# Altium PCB EPS 2023-24.PcbDoc (part 1 of 2)
Units mm, origin at the board's own origin, x right, y up, seen from the top; angles counter-clockwise.
Board outline 95.88 x 90.17 mm, 2 copper layers (Top, Bottom); 258 components, 125 nets, 766 pads, 194 vias.
Unrouted connection lines stored in the file: 96.
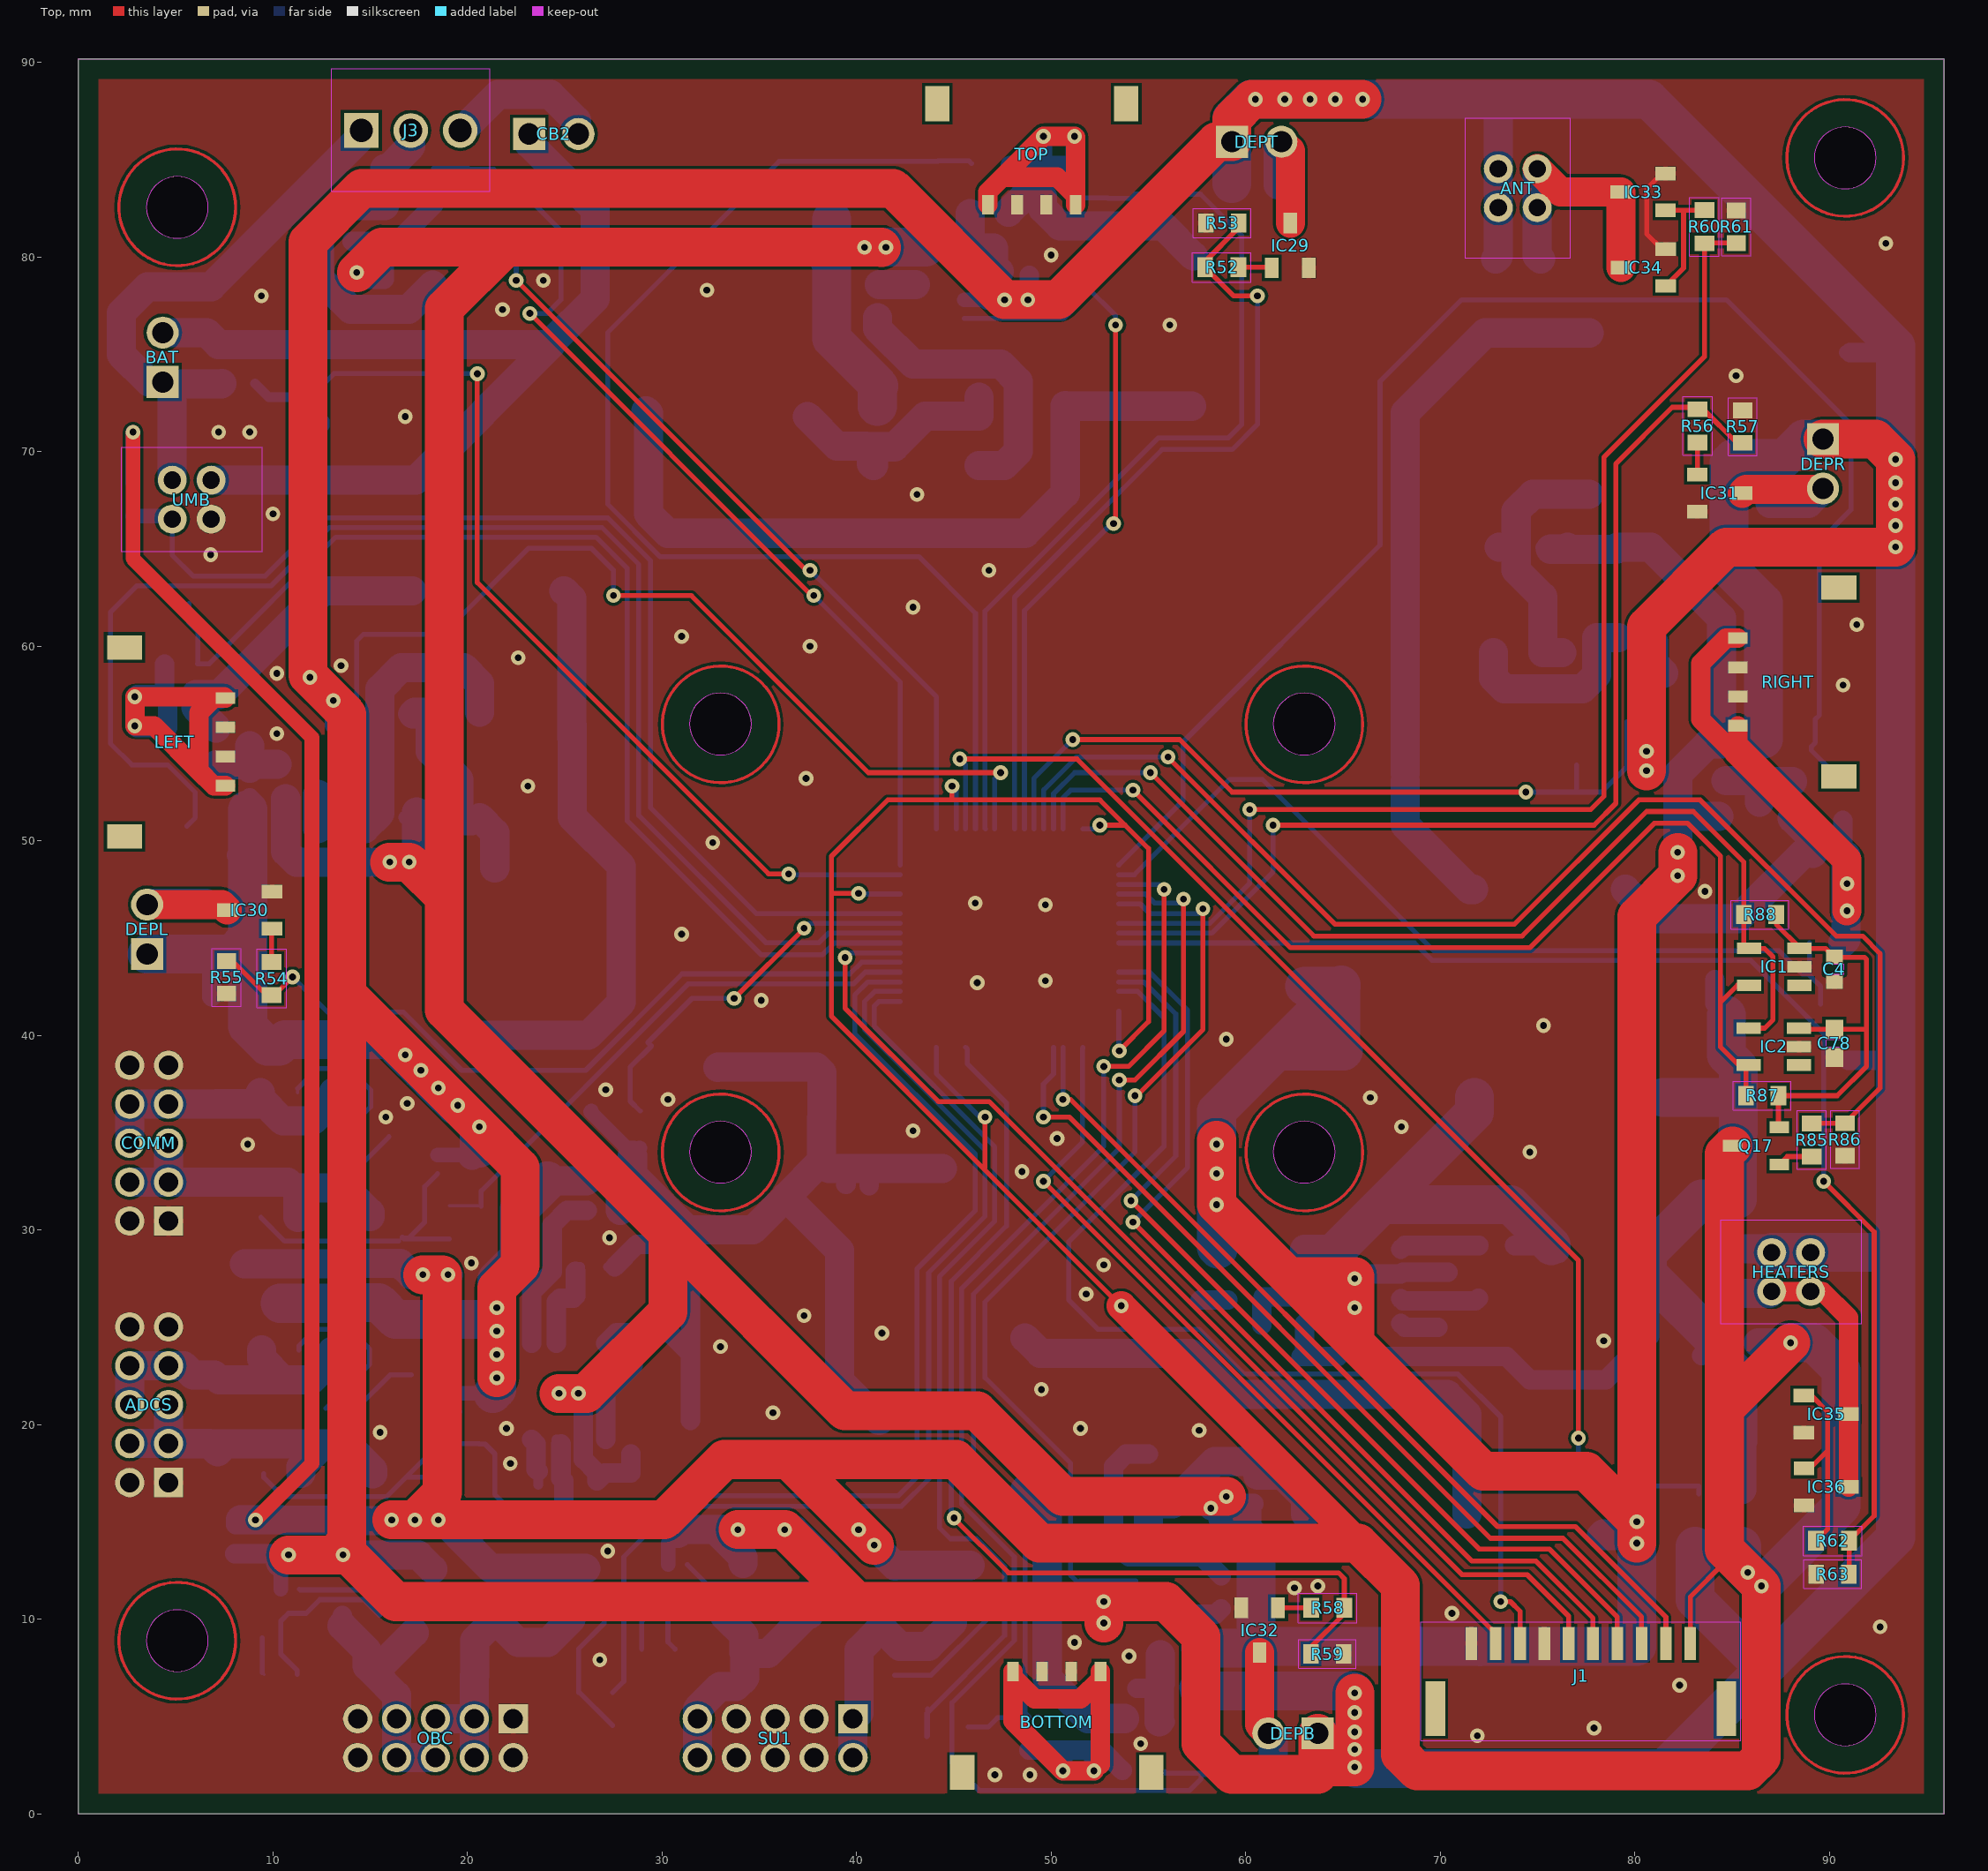
[diagram p0: Top view]
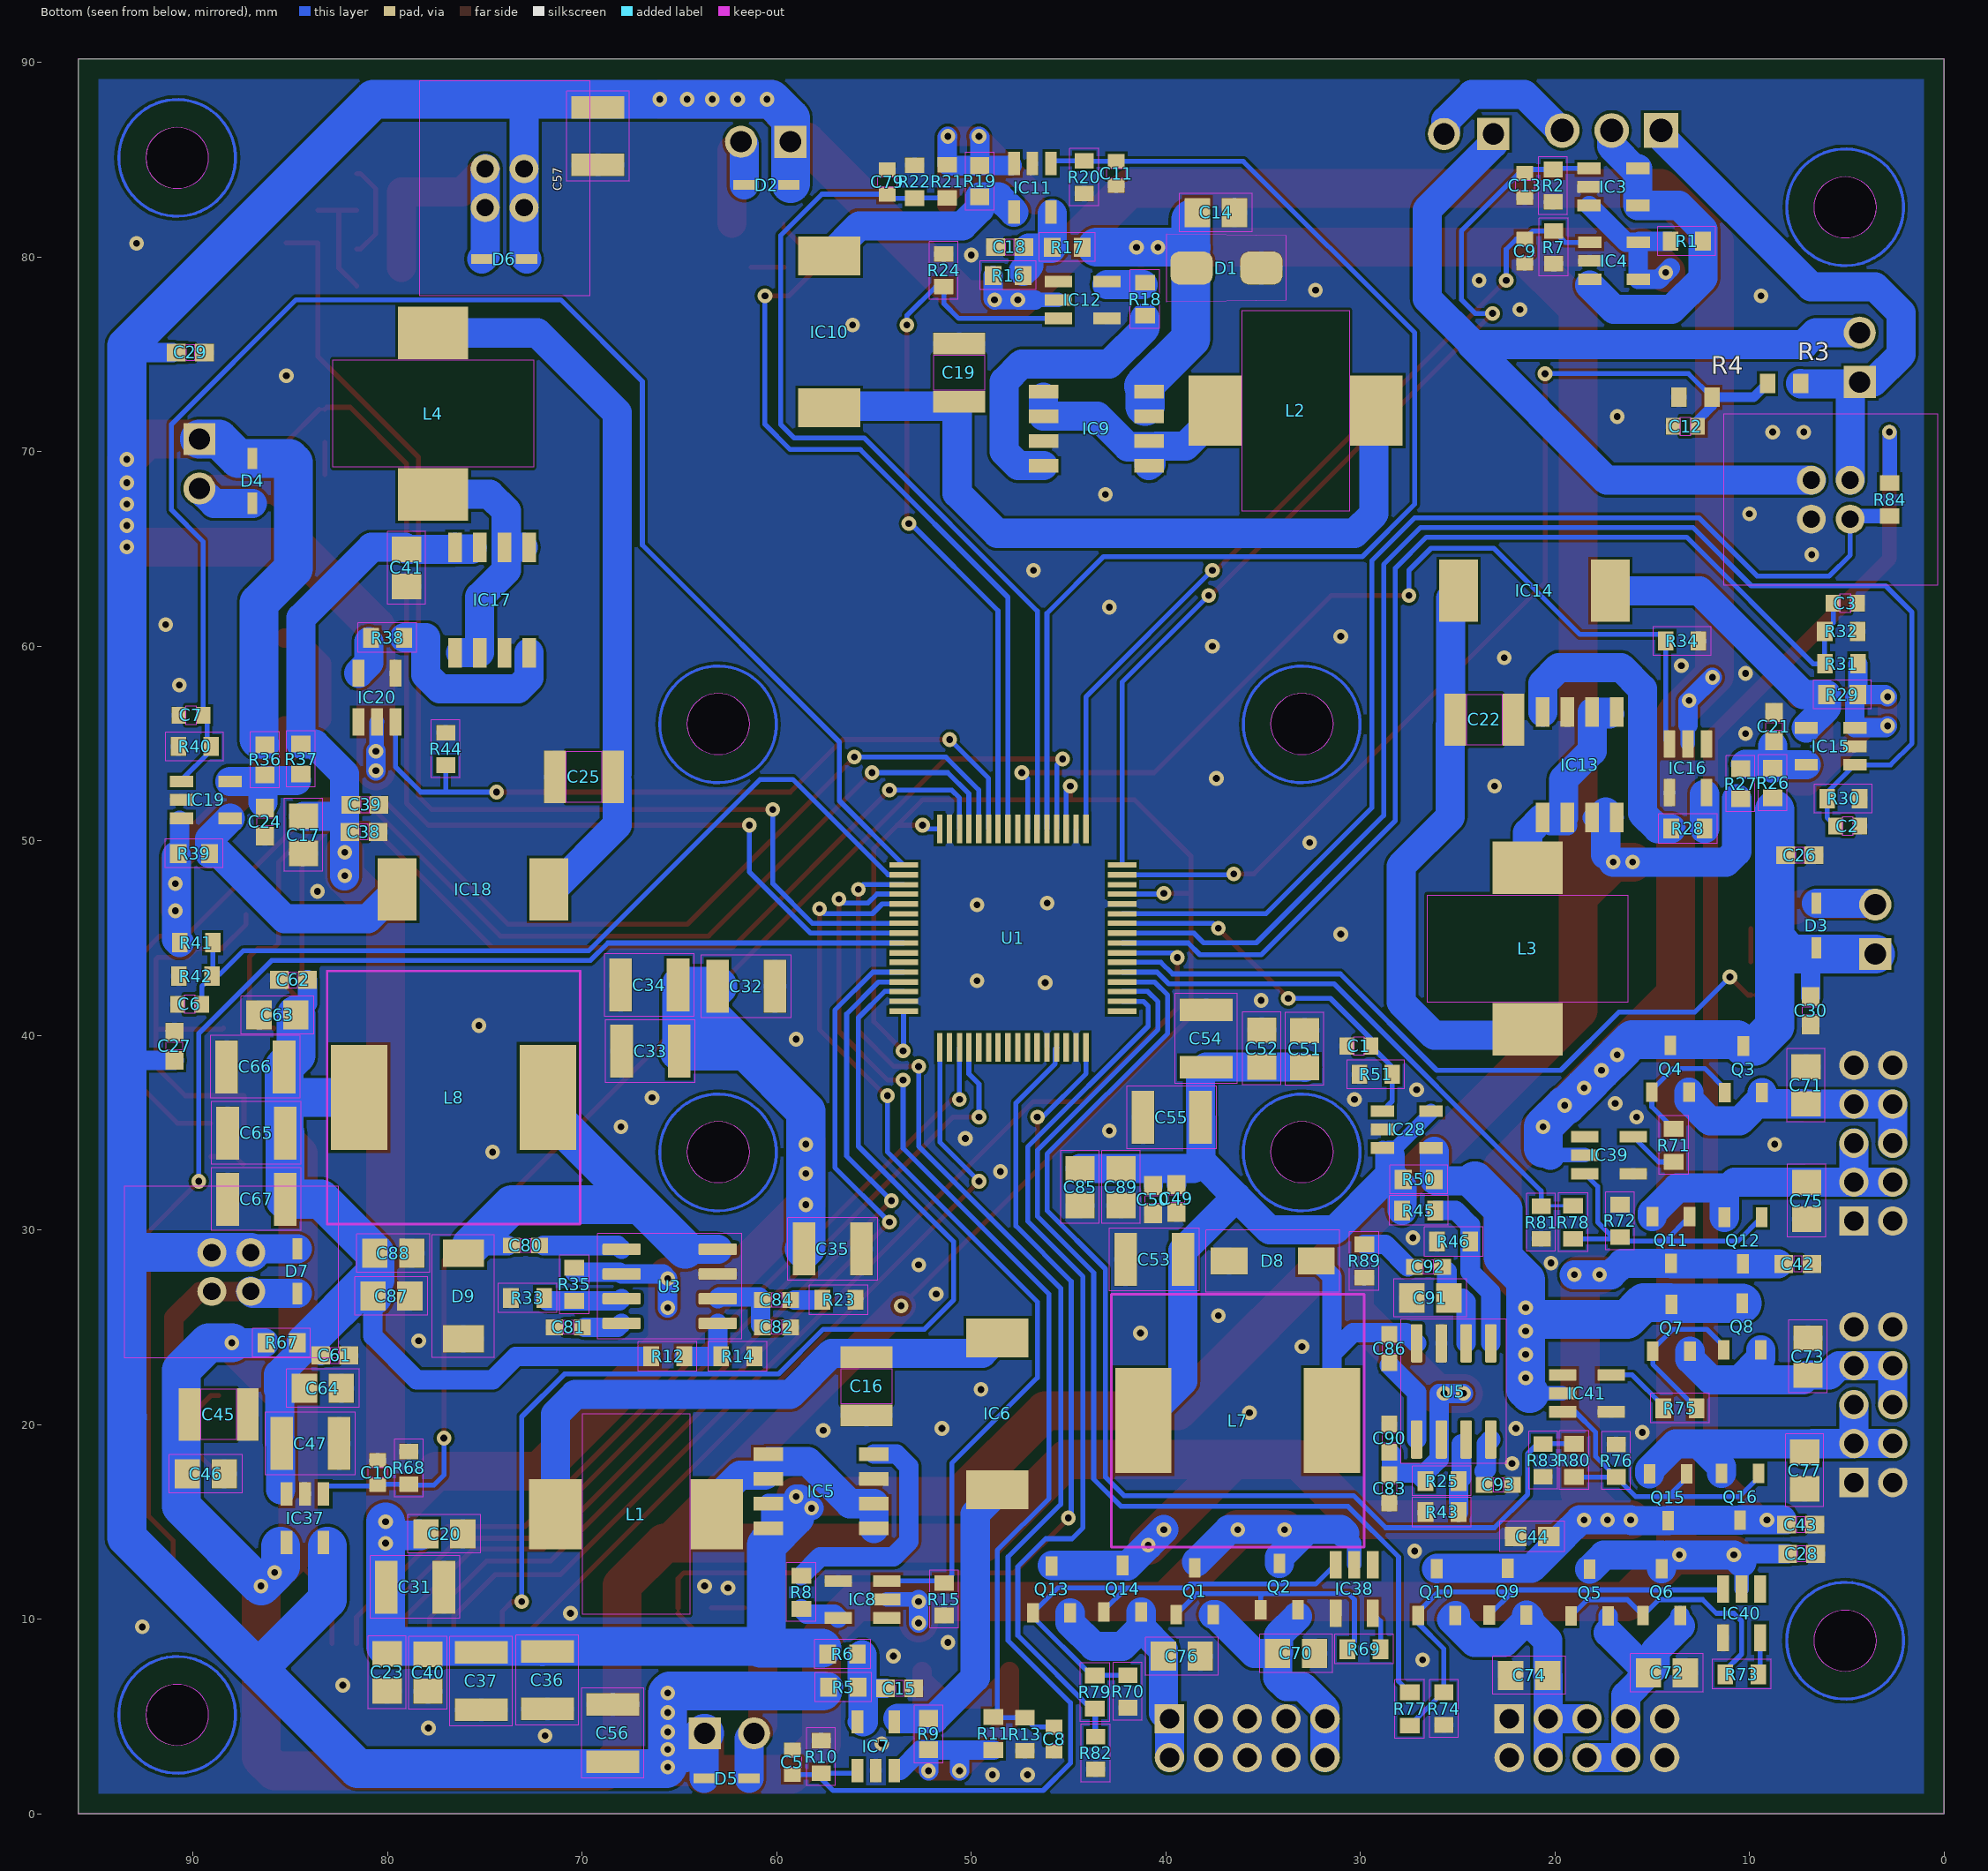
[diagram p1: Bottom view, seen from below]

## Layer stack, top to bottom
Top Solder: solder mask 0.0102, Solder Resist, Dk 3.5
Top: signal copper 0.035
Dielectric 1: dielectric 0.32, FR-4, Dk 4.8
Bottom: signal copper 0.035
Bottom Solder: solder mask 0.0102, Solder Resist, Dk 3.5

## Board outline
0,90.17 0,0 95.885,0 95.885,90.17
cut-out: 63,54.41 ccw(c63,56) 64.59,56 ccw(c63,56) 63,57.59 ccw(c63,56) 61.41,56 ccw(c63,56)
cut-out: 33,54.41 ccw(c33,56) 34.59,56 ccw(c33,56) 33,57.59 ccw(c33,56) 31.41,56 ccw(c33,56)
cut-out: 63,32.41 ccw(c63,34) 64.59,34 ccw(c63,34) 63,35.59 ccw(c63,34) 61.41,34 ccw(c63,34)
cut-out: 33,32.41 ccw(c33,34) 34.59,34 ccw(c33,34) 33,35.59 ccw(c33,34) 31.41,34 ccw(c33,34)
cut-out: 5.08,80.96 ccw(c5.08,82.55) 6.67,82.55 ccw(c5.08,82.55) 5.08,84.14 ccw(c5.08,82.55) 3.49,82.55 ccw(c5.08,82.55)
cut-out: 5.08,7.3 ccw(c5.08,8.89) 6.67,8.89 ccw(c5.08,8.89) 5.08,10.48 ccw(c5.08,8.89) 3.49,8.89 ccw(c5.08,8.89)
cut-out: 90.81,3.49 ccw(c90.81,5.08) 92.4,5.08 ccw(c90.81,5.08) 90.81,6.67 ccw(c90.81,5.08) 89.22,5.08 ccw(c90.81,5.08)
cut-out: 90.81,83.5 ccw(c90.81,85.09) 92.4,85.09 ccw(c90.81,85.09) 90.81,86.68 ccw(c90.81,85.09) 89.22,85.09 ccw(c90.81,85.09)

## Design rules (kind name [scope] priority, off if disabled: settings)
BoardOutlineClearance mdCopperDimension [All] p1: gap=0.254 ignorepadtopadclearanceinfootprint=FALSE except(0: Arc-SplitContinuation Track-SplitContinuation SMDPad-SplitContinuation THPad-SplitContinuation Via-SplitContinuation Fill-SplitContinuation Poly-SplitContinuation Region-SplitContinuation Text-SplitContinuation; 1.016: Poly-OutlineEdge Poly-CavityEdge Poly-CutoutEdge Poly-SplitBarrior)
Clearance "Clearance (Same Net)" [All] p1: gap=0.152 ignorepadtopadclearanceinfootprint=FALSE
Clearance [All] p2: gap=0.152 ignorepadtopadclearanceinfootprint=FALSE
HoleSize [All] p1: absolutevalues=TRUE maxlimit=2540 minlimit=0.35 maxpercent=80.000 minpercent=20.000
HoleToHoleClearance mdDrill [All] p1: gap=0.152 allowstackedmicrovias=TRUE
MinimumSolderMaskSliver [All] p1 off: minsoldermaskwidth=0.254
PasteMaskExpansion Expansion_SMDPaste_OFF [InPadClass('SMDPaste_OFF')] p1: expansion=0
PasteMaskExpansion mlMinCreamFrame [All] p2: expansion=0
PolygonConnect PolygonConnect_For_PolygonThermal_ON_Width100000_Gap0 [InPolygonClass('PolygonThermal_ON_Width100000_Gap0') vs Not IsVia] p1: connectstyle=Relief reliefconductorwidth=0.254 reliefentries=4 polygonreliefangle="90 Angle" airgapwidth=0
PolygonConnect ThermalVias [IsVia] p2: connectstyle=Direct reliefconductorwidth=0.254 reliefentries=4 polygonreliefangle="90 Angle" airgapwidth=0.254
PolygonConnect [All] p3: connectstyle=Relief reliefconductorwidth=0.254 reliefentries=4 polygonreliefangle="90 Angle" airgapwidth=0.254
RoutingVias [All] p1: holewidth=0.35 width=0.756 viastyle="Through Hole" minholewidth=0.35 minwidth=0.756 maxholewidth=2.54 maxwidth=2.54
SolderMaskExpansion mlMinStopFrame [All] p1: expansion=0.102 istentingtop=FALSE
Width [All] p1: maxlimit=0.254 minlimit=0.152 preferedwidth=0.152
26 further rules are at their usual default settings.

## Classes and differential pairs
polygon class PolygonThermal_ON_Width100000_Gap0: Polygon_1_Net_GND Polygon_2_Net_GND
pad class SMDPaste_OFF: D9-1 D9-2

## Components (designator, comment, footprint, x,y, rotation, side; value= is the part's Value field where it differs from the comment)
ADCS "" SHDR10W55P200_2X5_1265X630X640 4.63,17.02 r90 top
ANT "" SAMTEC-TMM-102-01-X-D 73.98,83.53 r180 top
BAT "" SHDR2W64P0X254_1X2_508X580X117 4.33,73.57 r270 top
BOTTOM "" 5040500491 50.28,7.31 r180 top
C1 "" YAG_CC0603_YAG-L 30.07,39.45 r180 bottom
C2 "" YAG_CC0603_YAG-L 4.95,50.75 r0 bottom
C3 "" YAG_CC0603_YAG-L 5.07,62.2 r0 bottom
C4 "1uf" YAG_CC0603_YAG-L 90.25,43.39 r90 top
C5 "" YAG_CC0603_YAG-L 59.2,2.64 r270 bottom
C6 "" YAG_CC0603_YAG-L 90.17,41.6 r180 bottom
C7 "" YAG_CC0603_YAG-L 90.1,56.45 r180 bottom
C8 "" YAG_CC0603_YAG-L 45.74,3.83 r90 bottom
C9 "" YAG_CC0603_YAG-L 21.54,80.3 r90 bottom
C10 "" YAG_CC0603_YAG-L 80.51,17.53 r270 bottom
C11 "" YAG_CC0603_YAG-L 42.54,84.29 r90 bottom
C12 "" YAG_CC0603_YAG-L 13.29,71.29 r180 bottom
C13 "" YAG_CC0603_YAG-L 21.54,83.68 r90 bottom
C14 "" CAPC2012X70 37.42,82.28 r180 bottom
C15 "" YAG_CC0603_YAG 53.68,6.44 r0 bottom
C16 "" CAP_CC1210_YAG 55.38,21.96 r90 bottom
C17 "" CAPC2012X70 84.32,50.3 r270 bottom
C18 "" YAG_CC0603_YAG 48.02,80.51 r180 bottom
C19 "" CAP_CC1210_YAG 50.62,74.06 r270 bottom
C20 "" CAPC2012X70 77.08,14.38 r180 bottom
C21 "" YAG_CC0603_YAG 8.74,55.87 r270 bottom
C22 "" CAP_CC1210_YAG 23.62,56.22 r0 bottom
C23 "" CAPC2012X70 80.02,7.26 r270 bottom
C24 "" YAG_CC0603_YAG 86.3,50.96 r90 bottom
C25 "" CAP_CC1210_YAG 69.9,53.28 r180 bottom
C26 "" YAG_CC0603_YAG 7.41,49.25 r0 bottom
C27 "" YAG_CC0603_YAG 90.95,39.44 r270 bottom
C28 "" YAG_CC0603_YAG 7.31,13.35 r0 bottom
C29 "" YAG_CC0603_YAG 90.13,75.09 r0 bottom
C30 "" YAG_CC0603_YAG 6.85,41.26 r90 bottom
C31 "" CAPC3225X280N 78.58,11.64 r0 bottom
C32 "" CAPC3225X280N 61.56,42.52 r0 bottom
C33 "" CAPC3225X280N 66.49,39.18 r180 bottom
C34 "" CAPC3225X280N 66.54,42.58 r180 bottom
C35 "" CAPC3225X280N 57.11,29.02 r0 bottom
C36 "" CAPC3225X280N 71.78,6.86 r90 bottom
C37 "" CAPC3225X280N 75.18,6.81 r90 bottom
C38 "" YAG_CC0603_YAG 81.21,50.45 r0 bottom
C39 "" YAG_CC0603_YAG 81.16,51.85 r0 bottom
C40 "" CAPC2012X70 77.92,7.24 r270 bottom
C41 "" CAPC2012X70 79.02,64.02 r270 bottom
C42 "" YAG_CC0603_YAG 7.51,28.25 r0 bottom
C43 "" YAG_CC0603_YAG 7.36,14.85 r0 bottom
C44 "" CAPC1608X90 21.16,14.24 r0 bottom
C45 "" CAP_CC1210_YAG 88.68,20.52 r0 bottom
C46 "" CAPC2012X70 89.34,17.46 r180 bottom
C47 "" CAPC3225X280N 83.96,19.02 r0 bottom
C49 "" YAG_CC0603_YAG 39.45,31.61 r90 bottom
C50 "" YAG_CC0603_YAG 40.65,31.56 r90 bottom
C51 "" CAPC2012X70 32.86,39.3 r90 bottom
C52 "" CAPC2012X70 35.06,39.32 r90 bottom
C53 "" CAPC3225X280N 40.59,28.48 r180 bottom
C54 "" CAPC3225X280N 37.92,39.84 r270 bottom
C55 "" CAPC3225X280N 39.69,35.78 r180 bottom
C56 "" CAPC3225X280N 68.42,4.14 r270 bottom
C57 "" CAPC3225X280N 69.18,86.21 r90 bottom
C61 "" YAG_CC0603_YAG 82.71,23.55 r0 bottom
C62 "" YAG_CC0603_YAG 84.84,42.85 r180 bottom
C63 "" CAPC2012X70 85.66,41.04 r0 bottom
C64 "" CAPC2012X70 83.32,21.86 r180 bottom
C65 "" CAPC3225X280N 86.74,34.98 r180 bottom
C66 "" CAPC3225X280N 86.79,38.38 r180 bottom
C67 "" CAPC3225X280N 86.74,31.58 r180 bottom
C70 "" CAPC2012X70 33.3,8.24 r0 bottom
C71 "" CAPC2012X70 7.09,37.43 r270 bottom
C72 "" CAPC2012X70 14.24,7.24 r0 bottom
C73 "" CAPC2012X70 6.99,23.49 r270 bottom
C74 "" CAPC2012X70 21.32,7.11 r180 bottom
C75 "" CAPC2012X70 7.06,31.5 r90 bottom
C76 "" CAPC2012X70 39.17,8.09 r0 bottom
C77 "" CAPC2012X70 7.16,17.64 r90 bottom
C78 "1uf" YAG_CC0603_YAG 90.25,39.59 r270 top
C79 "" YAG_CC0603_YAG-L 54.31,83.85 r270 bottom
C80 "" CC0603N_YAG 72.9,29.2 r180 bottom
C81 "" CC0603N_YAG 70.7,25 r180 bottom
C82 "" CC0603N_YAG 60,25 r0 bottom
C83 "" CC0603N_YAG 28.5,16.7 r270 bottom
C84 "" CC0603N_YAG 60,26.4 r0 bottom
C85 "" CAPC2012X70 44.4,32.2 r270 bottom
C86 "" CC0603N_YAG 28.5,23.9 r270 bottom
C87 "" CAPC2012X70 79.8,26.6 r180 bottom
C88 "" CAPC2012X70 79.7,28.8 r180 bottom
C89 "" CAPC2012X70 42.3,32.2 r270 bottom
C90 "" CC0603N_YAG 28.5,19.3 r270 bottom
C91 "" CAPC2012X70 26.4,26.5 r0 bottom
C92 "" CC0603N_YAG 26.5,28.1 r180 bottom
C93 "" CC0603N_YAG 22.9,16.9 r0 bottom
CB2 "" SHDR2W64P0X254_1X2_508X580X117 23.16,86.32 r180 top
COMM "" SHDR10W55P200_2X5_1265X630X640 4.63,30.46 r90 top
D1 "" DIOM449X264X300L114X135N 36.88,79.43 r180 bottom
D2 "" SOD2512X110N 60.52,83.7 r0 bottom
D3 "" SOD2512X110N 6.55,45.64 r90 bottom
D4 "" SOD2512X110N 86.94,68.49 r270 bottom
D5 "" SOD2512X110N 62.57,1.81 r180 bottom
D6 "" SOD2512X110N 74,79.89 r0 bottom
D7 "" SOD2512X110N 84.64,27.88 r270 bottom
D8 "" DIOM5226X100N 34.5,28.4 r0 bottom
D9 "" DIO_PMEG6030EVPX 76.1,26.6 r270 bottom
DEPB "" SHDR2W64P0X254_1X2_508X580X117 63.7,4.13 r0 top
DEPL "" SHDR2W64P0X254_1X2_508X580X117 3.53,44.18 r270 top
DEPR "" SHDR2W64P0X254_1X2_508X580X117 89.67,70.64 r90 top
DEPT "" SHDR2W64P0X254_1X2_508X580X117 59.29,85.92 r180 top
HEATERS "" SAMTEC-TMM-102-01-X-D 88.03,27.84 r90 top
IC1 "" SOT95P280X145-5N#1 87.16,43.52 r180 top
IC2 "" SOT95P280X145-5N#1 87.14,39.42 r180 top
IC3 "" SOT95P280X145-5N#2 16.99,83.6 r180 bottom
IC4 "" SOT95P280X145-5N#2 16.96,79.8 r180 bottom
IC5 "" SOIC127P600X175-8N 57.71,16.57 r0 bottom
IC6 "" SRU8043220Y 48.65,20.55 r90 bottom
IC7 "" SOT95P280X145-5N#2 54.9,3.47 r90 bottom
IC8 "" SOT95P270X145-5N 55.59,11.01 r0 bottom
IC9 "" SOIC127P600X175-8N 43.57,71.18 r180 bottom
IC10 "" SRU8043220Y 57.3,76.15 r270 bottom
IC11 "" SOT95P280X145-5N#2 46.85,83.55 r270 bottom
IC12 "" SOT95P270X145-5N 44.27,77.79 r180 bottom
IC13 "" SOIC127P600X175-8N 18.72,53.9 r270 bottom
IC14 "" SRU8043220Y 21.05,62.85 r0 bottom
IC15 "" SOT95P280X145-5N#2 5.83,54.85 r0 bottom
IC16 "" SOT95P270X145-5N 13.16,53.73 r270 bottom
IC17 "" SOIC127P600X175-8N 74.63,62.37 r90 bottom
IC18 "" SRU8043220Y 75.6,47.5 r180 bottom
IC19 "" SOT95P280X145-5N#2 89.34,52.1 r180 bottom
IC20 "" SOT95P270X145-5N 80.54,57.36 r90 bottom
IC28 "" SOT95P280X145-5N#2 27.62,35.16 r180 bottom
IC29 "" SOT95P240X120-3N 62.29,80.59 r90 top
IC30 "" SOT95P240X120-3N 8.8,46.44 r180 top
IC31 "" SOT95P240X120-3N 84.36,67.86 r0 top
IC32 "" SOT95P240X120-3N 60.71,9.43 r270 top
IC33 "" SOT95P240X120-3N 80.42,83.34 r180 top
IC34 "" SOT95P240X120-3N 80.43,79.46 r180 top
IC35 "" SOT95P240X120-3N 89.83,20.54 r0 top
IC36 "" SOT95P240X120-3N 89.84,16.79 r0 top
IC37 "" SOT95P280X145-5N#2 84.24,15.19 r270 bottom
IC38 "" SOT95P270X145-5N 30.31,11.55 r270 bottom
IC39 "" SOT95P270X145-5N 17.21,33.84 r180 bottom
IC40 "" SOT95P270X145-5N 10.4,10.29 r270 bottom
IC41 "" SOT95P270X145-5N 18.35,21.6 r180 bottom
J1 "" JST_BM10B-GHS-TBT(LF)(SN)(N) 77.22,6.43 r0 top
J3 "" MOLEX_0022272031 17.08,86.5 r180 top
L1 "" IND_B82464G4_EPC 67.22,15.4 r0 bottom
L2 "" IND_B82464G4_EPC 33.32,72.1 r180 bottom
L3 "" IND_B82464G4_EPC 21.4,44.46 r270 bottom
L4 "" IND_B82464G4_EPC 77.65,71.95 r90 bottom
L7 "" INDP125125X600N 36.3,20.2 r180 bottom
L8 "" INDP125125X600N 76.6,36.8 r180 bottom
LEFT "" 5040500491 7.56,55.08 r90 top
OBC "" SHDR10W55P200_2X5_1265X630X640 22.35,4.88 r180 top
Q1 "" SOT96P237X111-3N 38.51,11.44 r90 bottom
Q2 "" SOT96P237X111-3N 34.16,11.67 r90 bottom
Q3 "" SOT96P237X111-3N 10.31,38.25 r90 bottom
Q4 "" SOT96P237X111-3N 14.06,38.28 r90 bottom
Q5 "" SOT96P237X111-3N 18.21,11.36 r90 bottom
Q6 "" SOT96P237X111-3N 14.51,11.39 r90 bottom
Q7 "" SOT96P237X111-3N 14.01,24.97 r90 bottom
Q8 "" SOT96P237X111-3N 10.37,25.03 r90 bottom
Q9 "" SOT96P237X111-3N 22.42,11.41 r90 bottom
Q10 "" SOT96P237X111-3N 26.07,11.39 r90 bottom
Q11 "" SOT96P237X111-3N 14.03,29.48 r270 bottom
Q12 "" SOT96P237X111-3N 10.33,29.45 r270 bottom
Q13 "" SOT96P237X111-3N 45.87,11.53 r90 bottom
Q14 "" SOT96P237X111-3N 42.22,11.56 r90 bottom
Q15 "" SOT96P237X111-3N 14.18,16.26 r270 bottom
Q16 "" SOT96P237X111-3N 10.48,16.28 r270 bottom
Q17 "" SOT96P237X111-3N 86.22,34.32 r180 top
R1 "" RESC1608X55N#1 13.22,80.81 r0 bottom
R2 "" RESC1608X55N#1 20.09,83.66 r90 bottom
R3 "" RESC1608X55N#2 8.22,73.49 r180 bottom
R4 "" RESC1608X55N#2 12.77,72.79 r180 bottom
R5 "" RESC1508X50N 56.57,6.5 r0 bottom
R6 "" RESC1508X50N 56.61,8.2 r0 bottom
R7 "" RESC1608X55N#1 20.06,80.5 r270 bottom
R8 "" RESC1608X55N#3 58.73,11.38 r90 bottom
R9 "" RESC1608X55N#4 52.19,4.09 r90 bottom
R10 "" RESC1608X55N#1 57.71,2.92 r270 bottom
R11 "" RESC1608X55N#2 48.86,4.12 r270 bottom
R12 "" RESC1608X55N#3 65.6,23.5 r180 bottom
R13 "" RESC1608X55N#2 47.24,4.08 r90 bottom
R14 "" RESC1608X55N#3 62,23.5 r180 bottom
R15 "" RESC1608X55N#1 51.39,11.02 r90 bottom
R16 "" RESC1508X50N 48.1,79.05 r0 bottom
R17 "" RESC1508X50N 45.06,80.5 r180 bottom
R18 "" RESC1608X55N#3 41.07,77.83 r270 bottom
R19 "" RESC1608X55N#4 49.56,83.89 r270 bottom
R20 "" RESC1608X55N#1 44.19,84.1 r90 bottom
R21 "" RESC1608X55N#2 51.24,83.88 r90 bottom
R22 "" RESC1608X55N#2 52.91,83.87 r270 bottom
R23 "" RESC1608X55N#3 56.8,26.4 r0 bottom
R24 "" RESC1608X55N#1 51.41,79.31 r270 bottom
R25 "" RESC1608X55N#3 25.8,17.1 r0 bottom
R26 "" RESC1508X50N 8.8,52.97 r270 bottom
R27 "" RESC1508X50N 10.45,52.93 r270 bottom
R28 "" RESC1608X55N#3 13.16,50.62 r0 bottom
R29 "" RESC1608X55N#4 5.23,57.51 r0 bottom
R30 "" RESC1608X55N#1 5.17,52.16 r0 bottom
R31 "" RESC1608X55N#2 5.27,59.09 r180 bottom
R32 "" RESC1608X55N#2 5.28,60.76 r0 bottom
R33 "" RESC1608X55N#3 72.8,26.5 r180 bottom
R34 "" RESC1608X55N#1 13.46,60.26 r0 bottom
R35 "" RESC1608X55N#3 70.4,27.2 r90 bottom
R36 "" RESC1508X50N 86.3,54.16 r90 bottom
R37 "" RESC1508X50N 84.45,54.2 r90 bottom
R38 "" RESC1608X55N#3 80,60.43 r180 bottom
R39 "" RESC1608X55N#4 89.95,49.34 r180 bottom
R40 "" RESC1608X55N#1 89.91,54.84 r180 bottom
R41 "" RESC1608X55N#2 89.83,44.76 r0 bottom
R42 "" RESC1608X55N#2 89.87,43.04 r180 bottom
R43 "" RESC1608X55N#3 25.8,15.5 r180 bottom
R44 "" RESC1608X55N#1 77.01,54.72 r270 bottom
R45 "" RESC1608X55N#3 27,31 r180 bottom
R46 "" RESC1608X55N#3 25.2,29.4 r0 bottom
R50 "" RESC1608X55N#4 26.99,32.59 r180 bottom
R51 "" RESC1608X55N#1 29.2,37.99 r180 bottom
R52 "" RESC1608X55N#3 58.76,79.47 r180 top
R53 "" RESC1608X55N#1 58.79,81.74 r0 top
R54 "" RESC1608X55N#3 9.93,42.92 r270 top
R55 "" RESC1608X55N#1 7.61,42.98 r90 top
R56 "" RESC1608X55N#3 83.22,71.32 r90 top
R57 "" RESC1608X55N#1 85.54,71.28 r270 top
R58 "2.7" RESC1608X55N#3 64.21,10.58 r0 top
R59 "56k" RESC1608X55N#1 64.19,8.21 r180 top
R60 "" RESC1608X55N#3 83.57,81.55 r90 top
R61 "" RESC1608X55N#1 85.21,81.55 r90 top
R62 "2.7" RESC1608X55N#3 90.16,14.02 r180 top
R63 "56k" RESC1608X55N#1 90.16,12.31 r180 top
R67 "" RESC1608X55N#4 85.44,24.2 r0 bottom
R68 "" RESC1608X55N#1 78.9,17.77 r270 bottom
R69 "" RESC1608X55N#3 29.81,8.46 r0 bottom
R70 "" RESC1608X55N#1 41.95,6.28 r270 bottom
R71 "" RESC1608X55N#3 13.89,34.35 r90 bottom
R72 "" RESC1608X55N#1 16.65,30.46 r90 bottom
R73 "" RESC1608X55N#3 10.39,7.16 r0 bottom
R74 "" RESC1608X55N#1 25.7,5.4 r270 bottom
R75 "" RESC1608X55N#3 13.57,20.84 r180 bottom
R76 "" RESC1608X55N#1 16.85,18.14 r90 bottom
R77 "" RESC1608X55N#3 27.46,5.38 r270 bottom
R78 "" RESC1608X55N#3 19.06,30.39 r270 bottom
R79 "" RESC1608X55N#3 43.64,6.25 r90 bottom
R80 "" RESC1608X55N#3 19.01,18.16 r270 bottom
R81 "" RESC1608X55N#1 20.7,30.38 r90 bottom
R82 "" RESC1608X55N#1 43.6,3.12 r90 bottom
R83 "" RESC1608X55N#1 20.6,18.16 r90 bottom
R84 "" RESC1608X55N#2 2.79,67.53 r90 bottom
R85 "" RESC1608X55N#3 89.09,34.62 r270 top
R86 "" RESC1608X55N#1 90.8,34.65 r270 top
R87 "" RESC1608X55N#1 86.54,36.9 r0 top
R88 "" RESC1608X55N#1 86.43,46.2 r0 top
R89 "" RESC1608X55N#3 29.8,28.4 r90 bottom
RIGHT "" 5040500491 85.29,58.16 r270 top
SU1 "" SHDR10W55P200_2X5_1265X630X640 39.81,4.88 r180 top
TOP "" 5040500491 49,82.69 r0 top
U1 "" QFP50P1200X1200X160-64N 47.86,45 r0 bottom
U3 "" SOIC127P599X175-8N 65.5,27.1 r180 bottom
U5 "" SOIC127P599X175-8N 25.2,21.7 r90 bottom
UMB "" SAMTEC-TMM-102-01-X-D 5.82,67.53 r270 top

## Footprints (in the part's own frame and the unit in brackets; to place one, negate y for a bottom-side part, rotate by r counter-clockwise, add the part's x,y. Pads: shape width x height; smd on the part's side, far side on the other; paste and mask are expansions set on the pad)
5040500491 [mm] "5040500491"
  rect 0.6x1 smd: 1(2.25,0) 2(0.75,0) 3(-0.75,0) 4(-2.25,0)
  rect 1.25x1.8 smd: 5(4.855,5.19) 6(-4.855,5.19)
CAP_CC1210_YAG [mil] "CAP_CC1210_YAG"
  rect 44x106 smd: 1(-59,0) 2(59,0)
  Top keep-out region: -35.5,51.5 35.5,51.5 35.5,-51.5 -35.5,-51.5
CAPC1608X90 [mm] "CAPC1608X90"
  rect 1.1x1 smd: 1(-0.85,0) 2(0.85,0)
  Top keep-out lines w0.051: -1.673,0.783 -1.673,-0.783 1.673,-0.783 1.673,0.783 -1.673,0.783
CAPC2012X70 [mm] "CAPC2012X70"
  rect 1.3x1.5 smd: 1(-0.95,0) 2(0.95,0)
  Top keep-out lines w0.051: 1.873,-0.983 1.873,0.983 -1.873,0.983 -1.873,-0.983 1.873,-0.983
CAPC3225X280N [mm] "CAPC3225X280N"
  rect 1.16x2.72 smd: 1(-1.475,0) 2(1.475,0)
  Top keep-out lines w0.05: -2.308,1.608 -2.308,-1.608 2.308,-1.608 2.308,1.608 -2.308,1.608
CC0603N_YAG [mil] "CC0603N_YAG"
  rect 34x32 smd: 1(-28.5,0) 2(28.5,0)
  Top keep-out region: -10,14.5 10,14.5 10,-14.5 -10,-14.5
DIO_PMEG6030EVPX [mm] "DIO_PMEG6030EVPX"
  rect 1.4x2.1 smd paste+0: 1(-2.2,0) 2(2.2,0)
  Top keep-out lines w0.05: 3.15,1.6 3.15,-1.6 -3.15,-1.6 -3.15,1.6 3.15,1.6
DIOM449X264X300L114X135N [mm] "DIOM449X264X300L114X135N"
  rrect54% 2.17x1.69 smd: A(1.795,0) C(-1.795,0)
  Top keep-out lines w0.05: 3.08,-1.65 3.08,1.65 -3.08,1.75 -3.08,-1.75 3.08,-1.65
DIOM5226X100N [mm] "DIOM5226X100N"
  rect 1.89x1.38 smd: A(2.24,0) C(-2.24,0)
  Top keep-out lines w0.05: -3.435,1.6 3.435,1.6 3.435,-1.6 -3.435,-1.6 -3.435,1.6
IND_B82464G4_EPC [mil] "IND_B82464G4_EPC"
  rect 106.5x142 smd: 1(-163.25,0) 2(163.25,0)
  Top keep-out region: -108.5,203 108.5,203 108.5,-203 -108.5,-203
INDP125125X600N [mm] "INDP125125X600N"
  rect 2.9x5.4 smd: 1(-4.85,0) 2(4.85,0)
  Top keep-out lines w0.127: 6.5,-6.5 -6.5,-6.5 -6.5,6.5 6.5,6.5 6.5,-6.5
JST_BM10B-GHS-TBT(LF)(SN)(N) [mm] "JST_BM10B-GHS-TBT(LF)(SN)(N)"
  rect 0.6x1.7 smd: 1(5.625,2.325) 2(4.375,2.325) 3(3.125,2.325) 4(1.875,2.325) 5(0.625,2.325) 6(-0.625,2.325) 7(-1.875,2.325) 8(-3.125,2.325) 9(-4.375,2.325) 10(-5.625,2.325)
  rect 1x2.8 smd: S1(-7.475,-1.025) S2(7.475,-1.025)
  Top keep-out lines w0.05: -8.225,-2.68 8.225,-2.68 8.225,3.43 -8.225,3.43 -8.225,-2.68
MOLEX_0022272031 [mm] "MOLEX_0022272031"
  rect 1.785x1.785 / inner round 1.649 / far side rect 1.785x1.785 hole 1.19: 1(2.54,0)
  round 1.785 hole 1.19: 2(0,0) 3(-2.54,0)
  Top keep-out lines w0.05: 4.06,3.13 -4.06,3.13 -4.06,-3.17 4.06,-3.17 4.06,3.13
QFP50P1200X1200X160-64N [mil] "QFP50P1200X1200X160-64N"
  rect 58x11 smd: 1(-221,148) 2(-221,128) 3(-221,108) 4(-221,89) 5(-221,69) 6(-221,49) 7(-221,30) 8(-221,10) 9(-221,-10) 10(-221,-30) 11(-221,-49) 12(-221,-69) 13(-221,-89) 14(-221,-108) 15(-221,-128) 16(-221,-148) 33(221,-148) 34(221,-128) 35(221,-108) 36(221,-89) 37(221,-69) 38(221,-49) 39(221,-30) 40(221,-10) 41(221,10) 42(221,30) 43(221,49) 44(221,69) 45(221,89) 46(221,108) 47(221,128) 48(221,148)
  rect 11x58 smd: 17(-148,-221) 18(-128,-221) 19(-108,-221) 20(-89,-221) 21(-69,-221) 22(-49,-221) 23(-30,-221) 24(-10,-221) 25(10,-221) 26(30,-221) 27(49,-221) 28(69,-221) 29(89,-221) 30(108,-221) 31(128,-221) 32(148,-221) 49(148,221) 50(128,221) 51(108,221) 52(89,221) 53(69,221) 54(49,221) 55(30,221) 56(10,221) 57(-10,221) 58(-30,221) 59(-49,221) 60(-69,221) 61(-89,221) 62(-108,221) 63(-128,221) 64(-148,221)
RESC1508X50N [mm] "RESC1508X50N"
  rect 0.86x0.98 smd: 1(-0.765,0) 2(0.765,0)
  Top keep-out lines w0.05: -1.444,0.74 -1.444,-0.74 1.444,-0.74 1.444,0.74 -1.444,0.74
RESC1608X55N#1 [mil] "RESC1608X55N"
  rect 31.5x38.58 smd: 1(-32.95,0) 2(32.95,0)
  Top keep-out lines w1.97: -58.46,29.13 -58.46,-29.13 58.46,-29.13 58.46,29.13 -58.46,29.13
RESC1608X55N#2 [mil] "RESC1608X55N"
  rect 31.5x39.37 smd: 1(-33.46,0) 2(33.46,0)
RESC1608X55N#3 [mil] "RESC1608X55N"
  rect 31.89x40.16 smd: 1(-33.58,0) 2(33.58,0)
  Top keep-out lines w1.97: -59.37,-29.84 -59.37,29.84 59.37,29.84 59.37,-29.84 -59.37,-29.84
RESC1608X55N#4 [mil] "RESC1608X55N"
  rect 34.25x38.58 smd: 1(-31.5,0) 2(31.5,0)
  Top keep-out lines w1.97: -58.46,-29.13 -58.46,29.13 58.46,29.13 58.46,-29.13 -58.46,-29.13
SAMTEC-TMM-102-01-X-D [mm] "SAMTEC-TMM-102-01-X-D"
  round 1.49 hole 0.89: 1(-1,-1) 2(-1,1) 3(1,-1) 4(1,1)
  Top keep-out region: -2.685,-3.605 -2.685,3.605 2.685,3.605 2.685,-3.605 -2.685,-3.605
  Bottom keep-out region: -4.39,-5.51 -4.39,5.51 4.39,5.51 4.39,-5.51 -4.39,-5.51
SHDR2W64P0X254_1X2_508X580X117 [mm] "SHDR2W64P0X254_1X2_508X580X117"
  rect 1.65x1.65 / inner round 1.524 / far side rect 1.65x1.65 hole 1.1: 1(0,0)
  round 1.65 hole 1.1: 2(-2.54,0)
SHDR10W55P200_2X5_1265X630X640 [mm] "SHDR10W55P200_2X5_1265X630X640"
  rect 1.508x1.508 / inner round 1.393 / far side rect 1.508x1.508 hole 1: 1(0,0)
  round 1.508 hole 1: 2(0,2) 3(2,0) 4(2,2) 5(4,0) 6(4,2) 7(6,0) 8(6,2) 9(8,0) 10(8,2)
SOD2512X110N [mm] "SOD2512X110N"
  rect 1.1x0.5 smd: 1(-1.15,0) 2(1.15,0)
SOIC127P599X175-8N [mm] "SOIC127P599X175-8N"
  rrect25% 1.97x0.6 smd: 1(-2.47,1.905) 2(-2.47,0.635) 3(-2.47,-0.635) 4(-2.47,-1.905) 5(2.47,-1.905) 6(2.47,-0.635) 7(2.47,0.635) 8(2.47,1.905)
  Top keep-out lines w0.05: 3.705,-2.703 3.705,2.703 -3.705,2.703 -3.705,-2.703 3.705,-2.703
SOIC127P600X175-8N [mm] "SOIC127P600X175-8N"
  rect 1.525x0.7 smd: 1(-2.712,1.905) 2(-2.712,0.635) 3(-2.712,-0.635) 4(-2.712,-1.905) 5(2.712,-1.905) 6(2.712,-0.635) 7(2.712,0.635) 8(2.712,1.905)
SOT95P240X120-3N [mm] "SOT95P240X120-3N"
  rect 1.05x0.7 smd: 1(-1.15,0.95) 2(-1.15,-0.95) 3(1.15,0)
SOT95P270X145-5N [mm] "SOT95P270X145-5N"
  rect 1.4x0.6 smd: 1(-1.25,0.95) 2(-1.25,0) 3(-1.25,-0.95) 4(1.25,-0.95) 5(1.25,0.95)
SOT95P280X145-5N#1 [mm] "SOT95P280X145-5N"
  rect 1.25x0.6 smd: 1(-1.3,0.95) 2(-1.3,0) 3(-1.3,-0.95) 4(1.3,-0.95) 5(1.3,0.95)
SOT95P280X145-5N#2 [mm] "SOT95P280X145-5N"
  rect 1.2x0.6 smd: 1(-1.25,0.95) 2(-1.25,0) 3(-1.25,-0.95) 4(1.25,-0.95) 5(1.25,0.95)
SOT96P237X111-3N [mm] "SOT96P237X111-3N"
  rect 1x0.6 smd: 1(-1.2,0.955) 2(-1.2,-0.955) 3(1.2,0)
SRU8043220Y [mm] "SRU8043220Y"
  rect 2x3.2 smd: 1(-3.9,0) 2(3.9,0)
YAG_CC0603_YAG [mil] "YAG_CC0603_YAG"
  rect 38x36 smd: 1(-28.5,0) 2(28.5,0)
  Top keep-out region: -8,16.5 8,16.5 8,-16.5 -8,-16.5
YAG_CC0603_YAG-L [mil] "YAG_CC0603_YAG-L"
  rect 30x34 smd: 1(-24.5,0) 2(24.5,0)
  Top keep-out region: -10.5,19 10.5,19 10.5,-19 -10.5,-19

## Part data
ADCS COMM OBC SU1: library part SHDR10W55P200_2X5_1265X630X640, PackageName=SHDR10W55P200_2X5_1265X630X640
ANT HEATERS UMB: library part SAMTEC-TMM-102-01-X-D, PackageName=SAMTEC-TMM-102-01-X-D
BAT CB2 DEPB DEPL DEPR DEPT: library part SHDR2W64P0X254_1X2_508X580X117, PackageName=SHDR2W64P0X254_1X2_508X580X117
BOTTOM LEFT RIGHT TOP: library part 5040500491, PackageName=5040500491
C1 C2 C3 C4 C5 C6 C7 C8 C9 C10 C11 C12 C13 C79: library part YAG_CC0603_YAG-L, PackageName=YAG_CC0603_YAG-L
C14 C17 C20 C23 C40 C41 C46 C51 C52 C63 C64 C70 C71 C72 C73 C74 C75 C76 C77 C85 C87 C88 C89 C91: library part CAPC2012X70, PackageName=CAPC2012X70
C15 C18 C21 C24 C26 C27 C28 C29 C30 C38 C39 C42 C43 C49 C50 C61 C62 C78: library part YAG_CC0603_YAG, PackageName=YAG_CC0603_YAG
C16 C19 C22 C25 C45: library part CAP_CC1210_YAG, PackageName=CAP_CC1210_YAG
C31 C32 C33 C34 C35 C36 C37 C47 C53 C54 C55 C56 C57 C65 C66 C67: library part CAPC3225X280N, PackageName=CAPC3225X280N
C44: library part CAPC1608X90, PackageName=CAPC1608X90
C80 C81 C82 C83 C84 C86 C90 C92 C93: library part CC0603N_YAG, PackageName=CC0603N_YAG
D1: library part DIOM449X264X300L114X135N, PackageName=DIOM449X264X300L114X135N
D2 D3 D4 D5 D6 D7: library part SOD2512X110N, PackageName=SOD2512X110N
D8: library part DIOM5226X100N, PackageName=DIOM5226X100N
D9: library part DIO_PMEG6030EVPX, PackageName=DIO_PMEG6030EVPX
IC1 IC2 IC3 IC4 IC7 IC11 IC15 IC19 IC28 IC37: library part SOT95P280X145-5N, PackageName=SOT95P280X145-5N
IC5 IC9 IC13 IC17: library part SOIC127P600X175-8N, PackageName=SOIC127P600X175-8N
IC6 IC10 IC14 IC18: library part SRU8043220Y, PackageName=SRU8043220Y
IC8 IC12 IC16 IC20 IC38 IC39 IC40 IC41: library part SOT95P270X145-5N, PackageName=SOT95P270X145-5N
IC29 IC30 IC31 IC32 IC33 IC34 IC35 IC36: library part SOT95P240X120-3N, PackageName=SOT95P240X120-3N
J1: library part JST_BM10B-GHS-TBT(LF)(SN)(N), PackageName=JST_BM10B-GHS-TBT(LF)(SN)(N)
J3: library part MOLEX_0022272031, PackageName=MOLEX_0022272031
L1 L2 L3 L4: library part IND_B82464G4_EPC, PackageName=IND_B82464G4_EPC
L7 L8: library part INDP125125X600N, PackageName=INDP125125X600N
Q1 Q2 Q3 Q4 Q5 Q6 Q7 Q8 Q9 Q10 Q11 Q12 Q13 Q14 Q15 Q16 Q17: library part SOT96P237X111-3N, PackageName=SOT96P237X111-3N
R1 R2 R3 R4 R7 R8 R9 R10 R11 R12 R13 R14 R15 R18 R19 R20 R21 R22 R23 R24 R25 R28 R29 R30 R31 R32 R33 R34 R35 R38 R39 R40 R41 R42 R43 R44 R45 R46 R50 R51 R52 R53 R54 R55 R56 R57 R58 R59 R60 R61 R62 R63 R67 R68 R69 R70 R71 R72 R73 R74 R75 R76 R77 R78 R79 R80 R81 R82 R83 R84 R85 R86 R87 R88 R89: library part RESC1608X55N, PackageName=RESC1608X55N
R5 R6 R16 R17 R26 R27 R36 R37: library part RESC1508X50N, PackageName=RESC1508X50N
U1: library part QFP50P1200X1200X160-64N, PackageName=QFP50P1200X1200X160-64N
U3 U5: library part SOIC127P599X175-8N, PackageName=SOIC127P599X175-8N

## Free pads (board coordinates)
  round 3.18 hole 3.18 unplated: MH1(5.08,8.89) MH2(5.08,82.55) MH3(90.81,85.09) MH4(90.81,5.08) MH5(33,56) MH6(63,56) MH7(33,34) MH8(63,34)

## Via types
v1: diameter 0.756/0.756 (per signal layer), hole 0.35, Top to Bottom, 194 vias

## Nets (pads, with @x,y where several pads share a name; then routed paths per layer and width w, separated by ;. In a path a pad name is that pad's centre, name@x,y a point inside that pad or via, vN(x,y) a via of type N, cw(c..) or ccw(c..) an arc to the next point about the centre after c; other vN are vias at no path point)
3_3V: C42.2 C43.2 C44.1 C45.2 C46.1 IC37.4 J1.1 Q9.3 Q10.3 Q11.3 Q12.3 Q13.3 Q14.3 Q15.3 Q16.3 Q17.3 R67.2 R84.2 U1.13 U1.19 U1.32 U1.48 U1.64 | length 382.1
  Top w0.254: v1(40.1,47.3) 38.7,47.3 ; v1(44.9,52.8) 44.9,52.1 ; v1(46.6,35.8) 46.6,33.2 46.54,33.14 ; v1(52.5,50.8) 53.8,50.8 ; v1(53.5,39.2) 55,40.7 55,49.6 53.8,50.8 ; 65.781,13.9 46.54,33.14 ; J1.1@82.845,8.755 82.845,11.145 84.6,12.9 85.1,12.4 v1(85.8,12.4) ; 38.7,47.3 38.7,49.2 41.6,52.1 44.9,52.1 ; 38.7,47.3 38.7,40.981 46.54,33.14 ; 44.9,52.1 52.5,52.1 53.8,50.8
  Top w0.75: v1(2.8,71) 2.8,64.5 12,55.3 12,18 v1(9.1,15.1)
  Top w1.5: v1(53.6,26.1) 65.781,13.919 65.781,13.9
  Top w2: v1(16.1,15.1) v1(17.3,15.1) ; v1(17.7,27.7) 18.7,27.7 18.7,16.5 v1(17.3,15.1) ; v1(40.9,13.8) 36.6,18.1 36.6,18.2 ; Q17.3@85.02,34.32 84.6,33.9 84.6,20.8 ; v1(88,24.2) 84.6,20.8 ; v1(17.3,15.1) 30.1,15.1 33.2,18.2 36.6,18.2 ; 36.6,18.2 45.1,18.2 49.4,13.9 65.781,13.9 67.952,11.728 67.952,3.047 68.8,2.2 85.8,2.2 86.5,2.9 v1(86.5,11.7) v1(85.8,12.4) 84.6,13.6 84.6,20.8
  Bottom w0.152: Q11.3@14,28.25 Q11.3@14.03,28.28 ; Q15.3@14.16,15.08 Q15.3@14.18,15.06 ; Q13.3@45.84,12.76 Q13.3@45.87,12.73
  Bottom w0.254: v1(40.1,47.3) 40.139,47.261 U1.13@42.247,47.261 ; Q14.3@41.97,12.73 42.19,12.73 Q14.3@42.22,12.76 ; U1.64@44.101,39.387 44.09,39.376 44.09,38.034 46.324,35.8 v1(46.6,35.8) ; v1(44.9,52.8) 45.117,52.583 U1.19@45.117,50.613 ; U1.32@51.619,50.613 52.313,50.613 v1(52.5,50.8) ; U1.48@53.473,41.241 53.473,39.226 v1(53.5,39.2) ; 85.49,12.71 v1(85.8,12.4) ; C45.2@90.179,20.52 90.58,20.52 C45.2@90.6,20.5 ; C46.1@90.29,17.46 90.54,17.46 C46.1@90.6,17.4
  Bottom w0.305: v1@16.06,15.06 v1(16.1,15.1)
  Bottom w0.75: R84.2@2.79,68.38 2.79,70.99 v1(2.8,71) ; C43.2@8.084,14.85 C43.2@8.334,15.1 ; C42.2@8.234,28.25 C42.2@8.534,28.25
  Bottom w1: C43.2@8.084,14.85 8.184,14.85 C43.2@8.414,15.08 ; 19.555,14.255 19.57,14.24 C44.1@20.31,14.24 ; IC37.4@85.19,13.94 85.29,13.94 85.49,13.74 ; R67.2@86.24,24.2 86.29,24.15 R67.2@86.34,24.2
  Bottom w1.5: C43.2@8.334,15.1 v1(9.1,15.1) 10.46,15.1 Q16.3@10.48,15.08 Q15.3@14.16,15.08 ; C42.2@8.534,28.25 Q12.3@10.33,28.25 Q11.3@14,28.25 ; Q11.3@14.03,28.28 16.53,28.28 17.11,27.7 v1(17.7,27.7) v1(19,27.7) ; Q15.3@14.18,15.06 v1@16.06,15.06 ; v1(16.1,15.1) v1(17.3,15.1) v1(18.5,15.1) 18.71,15.1 19.555,14.255 ; 19.57,14.24 21.2,12.61 22.42,12.61 26.05,12.61 Q10.3@26.07,12.59 ; v1(40.1,14.6) v1(40.9,13.8) Q14.3@41.97,12.73 ; Q14.3@42.22,12.76 Q13.3@45.84,12.76 ; R67.2@86.34,24.2 v1(88,24.2)
  Bottom w2: 85.49,12.71 85.49,13.74 ; v1@85.7,12.5 v1(85.8,12.4) v1(86.5,11.7) 90.6,15.8 90.6,17.4 90.6,20.5 90.6,22.8 89.2,24.2 v1(88,24.2)
12V: C14.1 C17.1 C20.1 C23.1 C31.2 C32.2 C33.2 C34.2 C35.2 C36.2 C37.2 C38.2 C39.2 C40.1 C41.1 C83.1 C90.2 D1.C IC3.3 IC4.4 IC4.5 IC5.7 IC5.8 IC9.7 IC9.8 IC13.7 IC13.8 IC17.7 IC17.8 R1.2 R6.2 R17.2 R25.2 R27.2 R35.2 R37.2 U3.2 U5.2 | length 374.8
  Top w1: v1(65.6,27.5) v1@65.6,27.6
  Top w2: v1(14.3,79.2) 15.6,80.5 21.95,80.5 ; v1(16,48.9) v1(17,48.9) 18.8,47.1 ; v1(24.7,21.6) v1(25.7,21.6) 26.1,21.6 30.3,25.8 30.3,29.8 ; v1@41.278,80.478 41.256,80.5 v1(40.4,80.5) 21.95,80.5 ; v1@58.5,34.6 v1(58.5,31.3) 62.3,27.5 ; v1(59,16.3) 50.6,16.3 46.2,20.7 39.4,20.7 30.3,29.8 ; 65.6,24.2 v1(65.6,27.5) ; v1@65.6,27.6 62.5,27.6 62.6,27.5 62.3,27.5 ; v1(80.1,13.9) v1(80.1,15) ; v1(82.2,49.4) v1(82.2,48.2) 80.1,46.1 v1(80.1,15) ; 18.8,47.1 18.8,77.35 21.95,80.5 ; 18.8,47.1 18.8,41.3 30.3,29.8 ; 62.3,27.5 72.2,17.6 77.5,17.6 v1(80.1,15)
  Bottom w0.254: IC3.3@18.238,82.648 IC3.3@18.24,82.65 ; C37.2@75.18,8.285 75.415,8.52 C37.2@75.78,8.52 ; C40.1@77.92,8.19 78.33,8.6 C40.1@78.6,8.6 ; C41.1@79.02,64.97 79.02,65.002 C41.1@79.1,65.082 ; C23.1@80.02,8.52 C23.1@80.1,8.6 ; C39.2@81.884,51.85 82.511,51.511 82.2,51.2 81.934,50.934 C38.2@81.934,50.45 ; 82.2,53.428 82.2,51.733 82.683,51.25 ; C17.1@83.72,51.85 C17.1@84.32,51.25
  Bottom w0.5: U5.2@25.835,19.23 U5.2@25.953,19.112 ; C83.1@28.4,17.5 28.4,17.524 C83.1@28.5,17.424 ; C90.2@28.4,18.476 C90.2@28.5,18.576 ; R35.2@70.4,27.835 R35.2@70.4,28.053
  Bottom w0.75: IC13.8@16.815,51.188 IC13.7@18.085,51.188 ; IC9.7@40.858,71.815 40.858,72.115 41.058,72.315 ; IC9.8@40.858,73.085 IC9.8@41.058,73.085 ; 43.543,80.5 R17.2@44.295,80.5 ; IC5.8@60.422,14.665 IC5.7@60.422,15.935 ; C36.2@71.78,8.335 C36.2@72.035,8.335 ; C37.2@75.18,8.285 C37.2@75.18,8.6 ; IC17.7@75.265,65.082 75.565,65.082 75.665,64.982 ; IC17.8@76.435,64.982 IC17.8@76.535,65.082 ; C31.2@80.055,11.64 C31.2@80.1,11.36
  Bottom w1: R27.2@10.45,52.165 R27.2@10.65,52.165 ; v1@14.057,79.443 v1(14.3,79.2) 14.65,78.85 IC4.4@15.71,78.85 IC4.5@15.71,80.75 ; R1.2@14.057,80.81 15.65,80.81 IC4.5@15.71,80.75 ; v1(17,48.9) 17.385,49.285 ; 17.385,51.488 17.785,51.488 IC13.7@18.085,51.188 ; IC3.3@18.24,82.648 18.238,82.648 16.34,80.75 IC4.5@15.71,80.75 ; v1(24.7,21.6) 25.953,21.6 25.953,19.112 25.953,18.219 26.653,17.518 R25.2@26.653,17.1 27.053,17.5 C83.1@28.4,17.5 ; C83.1@28.4,17.524 C90.2@28.4,18.476 ; C14.1@38.37,82.28 C14.1@38.721,81.929 ; IC9.8@40.858,73.085 IC9.8@41.144,73.371 ; R6.2@57.375,8.2 R6.2@57.675,8.5 ; 59.061,15.261 59.2,15.4 59.2,16.1 v1(59,16.3) 59.365,15.935 IC5.7@60.422,15.935 ; IC5.8@60.422,14.665 60.822,14.265 60.822,13.9 ; 60.822,8.5 60.822,8.6 ; C34.2@64.9,42.58 C34.2@65.065,42.58 ; v1(65.6,26) v1(65.6,27.5) 65.835,27.735 U3.2@67.97,27.735 68.07,27.835 R35.2@70.4,27.835 ; C20.1@78.03,14.38 C20.1@78.38,14.38 ; C23.1@80.02,8.21 C23.1@80.02,8.52
  Bottom w1.25: v1(58.2,15.7) 58.8,16.3 v1(59,16.3)
  Bottom w1.5: R27.2@10.65,52.165 10.65,49.45 11.2,48.9 v1(16,48.9) v1(17,48.9) ; 17.385,49.285 17.385,51.488 ; D1.C@38.37,79.735 D1.C@38.675,79.43 38.675,77.44 38.715,77.4 ; C36.2@72.035,8.335 C36.2@72.3,8.6 ; 75.665,64.982 IC17.8@76.435,64.982 ; C37.2@75.7,8.6 C37.2@75.78,8.52 ; IC17.8@76.535,65.082 76.647,64.97 C41.1@79.02,64.97 ; C20.1@78.38,14.38 78.3,14.3 79.4,14.3 v1(80.1,15) ; C41.1@79.1,65.082 80.818,65.082 84.45,61.45 R37.2@84.45,54.965 83.737,54.965 82.2,53.428 82.2,51.2 ; v1(82.2,48.2) v1(82.2,49.4) 82.2,51.2 ; C17.1@84.32,51.25 82.25,51.25 82.2,51.2
  Bottom w2: C14.1@38.721,81.929 38.721,80.479 ; 41.058,72.315 IC9.8@41.058,73.085 ; IC9.8@41.144,73.371 38.715,75.8 38.715,77.4 38.715,80.073 38.921,80.279 38.721,80.479 ; 43.543,80.5 v1(41.5,80.5) v1(40.4,80.5) 38.7,80.5 38.721,80.479 ; R6.2@57.675,8.5 60.822,8.5 ; C35.2@58.585,29.02 58.5,29.105 v1(58.5,31.3) v1(58.5,32.9) v1(58.5,34.4) 58.5,36.1 61.68,39.28 ; 59.061,15.261 60.522,13.8 60.522,8.6 60.822,8.6 72.3,8.6 C37.2@75.7,8.6 ; C32.2@63.035,42.52 C34.2@64.88,42.52 ; C34.2@64.9,42.58 C34.2@64.9,42.5 ; C37.2@75.18,8.6 C40.1@78.33,8.6 ; C40.1@78.6,8.6 80.1,8.6 80.1,11.36 v1(80.1,13.9) v1(80.1,15) ; 61.68,39.28 61.78,39.18 C33.2@65.015,39.18 64.88,39.315 C34.2@64.88,42.52 ; 61.68,39.28 C34.2@64.9,42.5 ; C34.2@64.88,42.52 C34.2@64.9,42.5
67: CB2.2 J3.3 | length 8
  Bottom w1.5: J3.3@19.62,86.5 19.714,86.5 21.561,88.347 24.259,88.347 25.6,87.006 25.6,86.42 CB2.2@25.7,86.32
ADCS_3_3V: ADCS.3 ADCS.4 ADCS.5 C77.2 Q15.2 Q16.2 | length 20.6
  Bottom w1.5: ADCS.4@2.63,19.02 ADCS.3@4.63,19.02 ; ADCS.5@4.63,21.02 ADCS.3@4.63,19.02 ; Q16.2@11.435,17.48 11.435,17.835 12.6,19 ; Q15.2@15.135,17.46 15.135,17.66 13.795,19 12.6,19 ; ADCS.3@4.63,19.02 4.65,19 C77.2@7.57,19 ; ADCS.3@4.63,19.02 6.73,19.02 C77.2@7.16,18.59 C77.2@7.57,19 ; C77.2@7.57,19 12.6,19
ADCS_5V: ADCS.6 ADCS.7 ADCS.8 C73.2 Q7.2 Q8.2 | length 15.5
  Bottom w1.5: ADCS.6@2.63,21.02 ADCS.8@2.63,23.02 ADCS.7@4.63,23.02 5.41,23.02 5.89,22.54 C73.2@6.99,22.54 7.23,22.3 10.5,22.3 ; Q8.2@9.415,23.83 9.415,23.385 10.5,22.3 ; Q7.2@13.055,23.77 13.055,23.37 11.985,22.3 10.5,22.3
ADCS_ONOFF: R80.1 R83.2 U1.4 | length 59.4
  Bottom w0.152: R83.2@20.584,19.013 R83.2@20.6,18.997
  Bottom w0.254: R80.1@19.01,19.013 R83.2@20.584,19.013 ; R83.2@20.6,18.997 20.9,18.997 21.4,18.497 21.4,16.4 23.103,14.697 28.697,14.697 30.35,16.35 42.15,16.35 43.1,17.3 43.1,28 46.1,31 46.1,33.9 39.9,40.1 39.9,42.062 40.577,42.739 U1.4@42.247,42.739
ADCS_ONOFF2: IC41.3 Q15.1 Q16.1 R76.1 R80.2 | length 16.9
  Bottom w0.152: R80.2@19.006,17.303 R80.2@19.01,17.307
  Bottom w0.254: Q16.1@9.525,17.48 9.525,17.275 10.5,16.3 14.185,16.3 ; Q15.1@13.225,17.46 13.225,17.26 14.185,16.3 ; R80.2@19.006,17.303 R76.1@16.85,17.303 ; IC41.3@19.6,20.65 18.95,20.65 17.9,19.6 17.9,18.353 R76.1@16.85,17.303 ; 14.185,16.3 15.847,16.3 R76.1@16.85,17.303
BAT+: BAT.1 J3.1 R3.2 UMB.1 | length 29.6
  Bottom w1.5: UMB.1@4.82,68.53 4.82,73.08 BAT.1@4.33,73.57 ; R3.2@7.37,73.49 7.35,73.47 4.43,73.47 BAT.1@4.33,73.57 ; J3.1@14.54,86.5 14.54,86.183 6.828,78.472 3.548,78.472 2.203,77.126 2.203,74.995 3.627,73.57 BAT.1@4.33,73.57
BAT-: BAT.2 CB2.1 UMB.2 | length 53.8
  Bottom w1.5: BAT.2@4.33,76.11 6.59,76.11 7.2,75.5 23.2,75.5 24.2,75.5 ; UMB.2@6.82,68.53 17.33,68.53 24.3,75.5 24.2,75.5 ; CB2.1@23.16,86.32 23.16,85.82 26.56,82.42 26.56,77.86 24.2,75.5
BOTTOM: BOTTOM.1 BOTTOM.4 IC7.3 R9.1 R11.2 | length 28.5
  Top w0.152: BOTTOM.1@48.03,7.01 BOTTOM.1@48.03,7.31 ; v1(52.2,2.2) 52.53,2.53 ; BOTTOM.4@52.53,6.93 BOTTOM.4@52.53,7.31
  Top w1: BOTTOM.1@48.03,7.01 49.14,5.9 51.5,5.9 BOTTOM.4@52.53,6.93 ; BOTTOM.1@48.03,7.31 48.03,4.77 v1(50.6,2.2) v1(52.2,2.2) ; 52.53,2.53 BOTTOM.4@52.53,7.31
  Bottom w0.152: v1@52.19,2.21 v1(52.2,2.2) ; 53.65,2.22 IC7.3@53.95,2.22
  Bottom w1: v1(50.6,2.2) 50.6,3.23 50.56,3.27 R11.2@48.86,3.27 52.17,3.27 R9.1@52.19,3.29 ; v1@52.19,2.21 R9.1@52.19,3.29 ; 53.65,2.22 52.58,3.29 R9.1@52.19,3.29
COMM_3_3V: C75.2 COMM.3 COMM.4 COMM.5 Q11.2 Q12.2 | length 18.1
  Bottom w0.254: 10.75,32.45 11.285,31.915 Q12.2@11.285,30.65
  Bottom w1.5: COMM.4@2.63,32.46 COMM.3@4.63,32.46 ; COMM.5@4.63,34.46 COMM.3@4.63,32.46 ; 10.75,32.45 C75.2@7.06,32.45 7.05,32.46 COMM.3@4.63,32.46 ; Q12.2@11.285,30.65 11.285,32.15 13.715,32.15 14.985,30.88 Q11.2@14.985,30.68
COMM_5V: C71.2 COMM.6 COMM.7 COMM.8 Q3.2 Q4.2 | length 14.7
  Bottom w0.152: C71.2@7.07,36.46 C71.2@7.09,36.48
  Bottom w1.5: COMM.6@2.63,34.46 COMM.8@2.63,36.46 COMM.7@4.63,36.46 C71.2@7.07,36.46 ; C71.2@7.09,36.48 9.355,36.48 Q3.2@9.355,37.05 9.355,36.745 10.5,35.6 12.025,35.6 13.105,36.68 Q4.2@13.105,37.08
COMM_ONOFF: R78.1 R81.2 U1.5 | length 28.6
  Bottom w0.152: R78.1@19.06,31.243 20.674,31.243 R81.2@20.7,31.217
  Bottom w0.254: R81.2@20.7,31.217 20.7,32 31.347,42.647 39.847,42.647 40.447,43.247 U1.5@42.247,43.247
COMM_ONOFF2: IC39.3 Q11.1 Q12.1 R72.1 R78.2 | length 16.3
  Bottom w0.152: R72.1@16.45,29.423 R72.1@16.65,29.623 R72.1@17.023,29.623
  Bottom w0.254: Q12.1@9.375,30.65 10.602,29.423 14.332,29.423 ; Q11.1@13.075,30.68 14.332,29.423 ; R72.1@16.45,29.423 14.332,29.423 ; R72.1@16.65,29.623 16.736,29.537 R78.2@19.06,29.537 ; R72.1@17.023,29.623 17.8,30.4 17.8,32.23 IC39.3@18.46,32.89
CTS: J1.5 U1.44 | length 49.8
  Top w0.254: v1(54.2,30.4) 71.616,12.984 74.911,12.984 77.845,10.05 J1.5@77.845,8.755
  Bottom w0.254: U1.44@53.473,43.247 55.053,43.247 57.007,41.293 57.007,33.207 v1(54.2,30.4)
DEPLOYANT: R60.1 R61.1 U1.39 | length 62.1
  Top w0.254: v1(60.2,51.6) 77.723,51.6 78.4,52.277 78.4,69.7 83.57,74.87 R60.1@83.57,80.697 83.586,80.713 R61.1@85.21,80.713
  Bottom w0.254: U1.39@53.473,45.762 58.162,45.762 60.2,47.8 v1(60.2,51.6)
DEPLOYBOTTOM: R58.2 R59.2 U1.61 | length 52.2
  Top w0.152: R59.2@63.353,8.21 R59.2@63.353,8.57 ; R58.2@65.063,10.28 R58.2@65.063,10.58
  Top w0.254: v1(45,15.2) 45,15.179 47.8,12.379 64.764,12.379 65.063,12.08 R58.2@65.063,10.58 ; R59.2@63.353,8.57 R58.2@65.063,10.28
  Bottom w0.254: v1(45,15.2) 44.856,15.344 44.856,27.356 47.7,30.2 47.7,36.523 45.688,38.534 45.688,39.298 U1.61@45.599,39.387
DEPLOYLEFT: R54.2 R55.2 U1.6 | length 40
  Top w0.152: R55.2@7.61,43.817 R55.2@7.91,43.817 ; R54.2@9.66,42.067 R54.2@9.93,42.067
  Top w0.254: R55.2@7.91,43.817 R54.2@9.66,42.067 ; R54.2@9.93,42.067 10.067,42.067 v1(11,43)
  Bottom w0.254: v1(11,43) 12.8,41.2 16.7,41.2 19.7,38.2 26.069,38.2 31.024,43.155 39.647,43.155 40.247,43.755 U1.6@42.247,43.755
DEPLOYRIGHT: R56.2 R57.2 U1.40 | length 55.6
  Top w0.152: R56.2@83.22,72.173 R56.2@83.51,72.173
  Top w0.254: v1(61.4,50.8) 77.9,50.8 79.02,51.92 79.02,69.373 81.92,72.273 83.12,72.273 R56.2@83.22,72.173 ; R56.2@83.51,72.173 85.24,70.443 R57.2@85.54,70.443
  Bottom w0.254: U1.40@53.473,45.254 58.254,45.254 61.4,48.4 v1(61.4,50.8)
DEPLOYTOP: R52.2 R53.2 U1.25 | length 41
  Top w0.152: R52.2@57.907,79.47 R52.2@57.907,79.77 ; R53.2@59.627,81.49 R53.2@59.627,81.74
  Top w0.254: R52.2@57.907,79.47 59.377,78 v1(60.6,78) ; R52.2@57.907,79.77 R53.2@59.627,81.49
  Bottom w0.254: U1.25@48.114,50.613 48.114,62.514 55.7,70.1 59.3,70.1 60.6,71.4 v1(60.6,78)